# EAGLE board teensyMotors02_up (EAGLE 9.1.3)
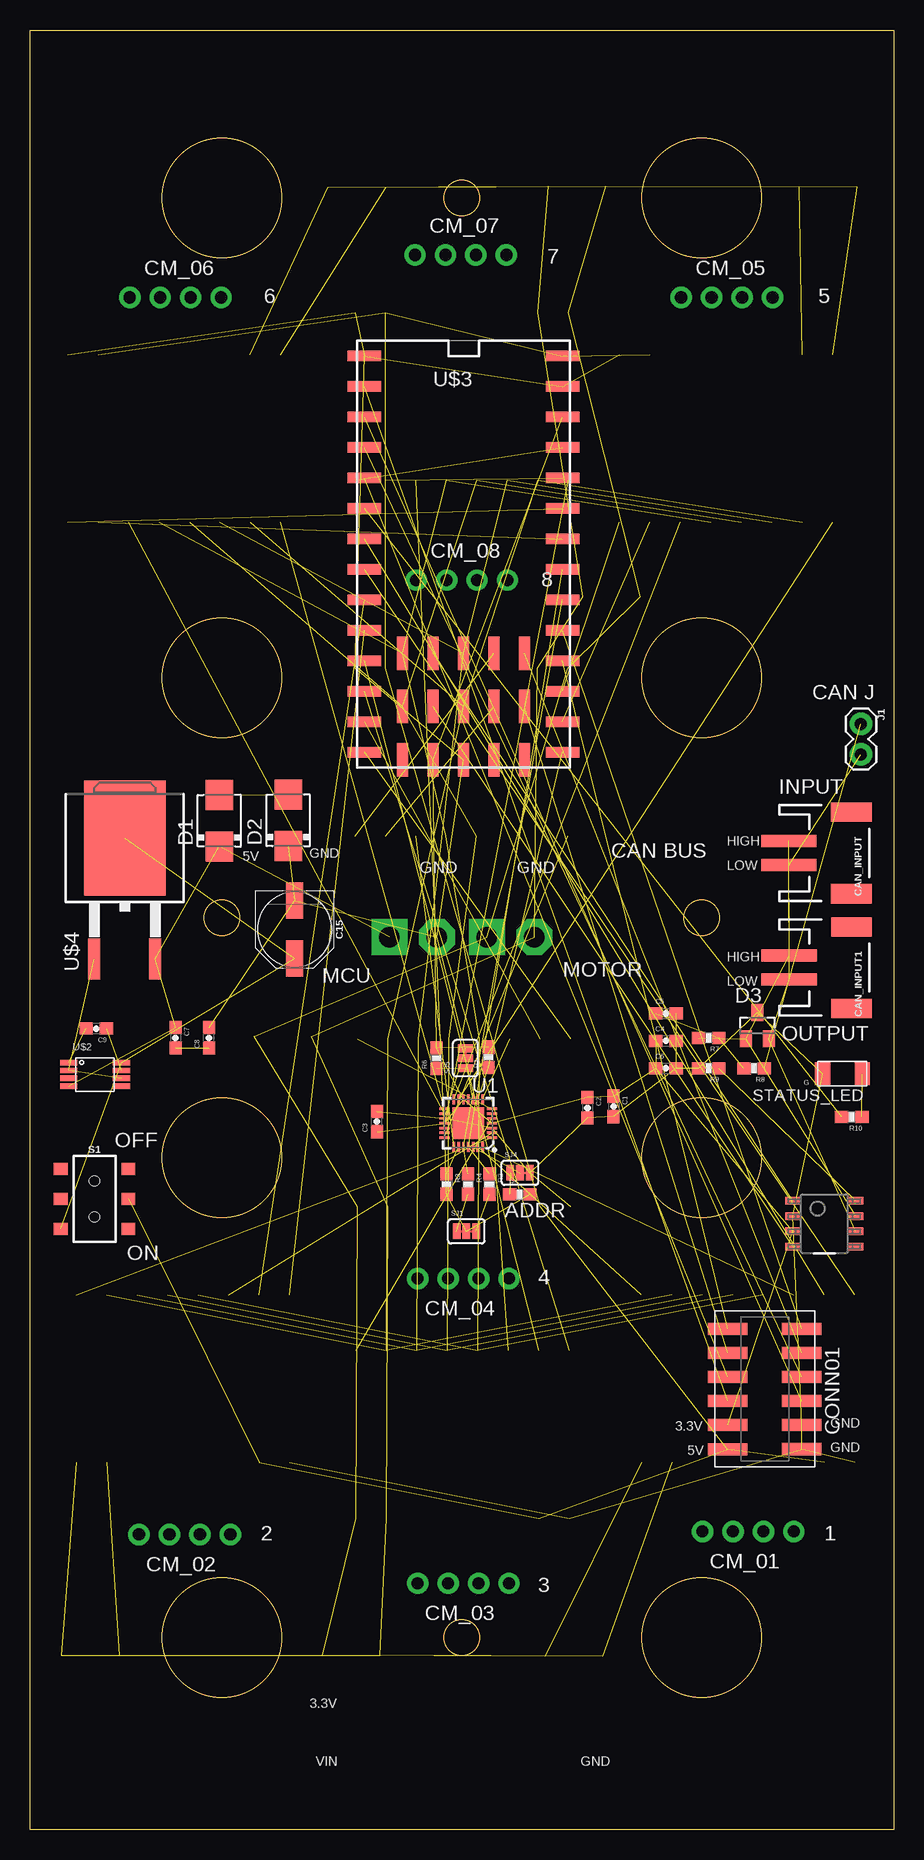
[diagram p0: board, top side]
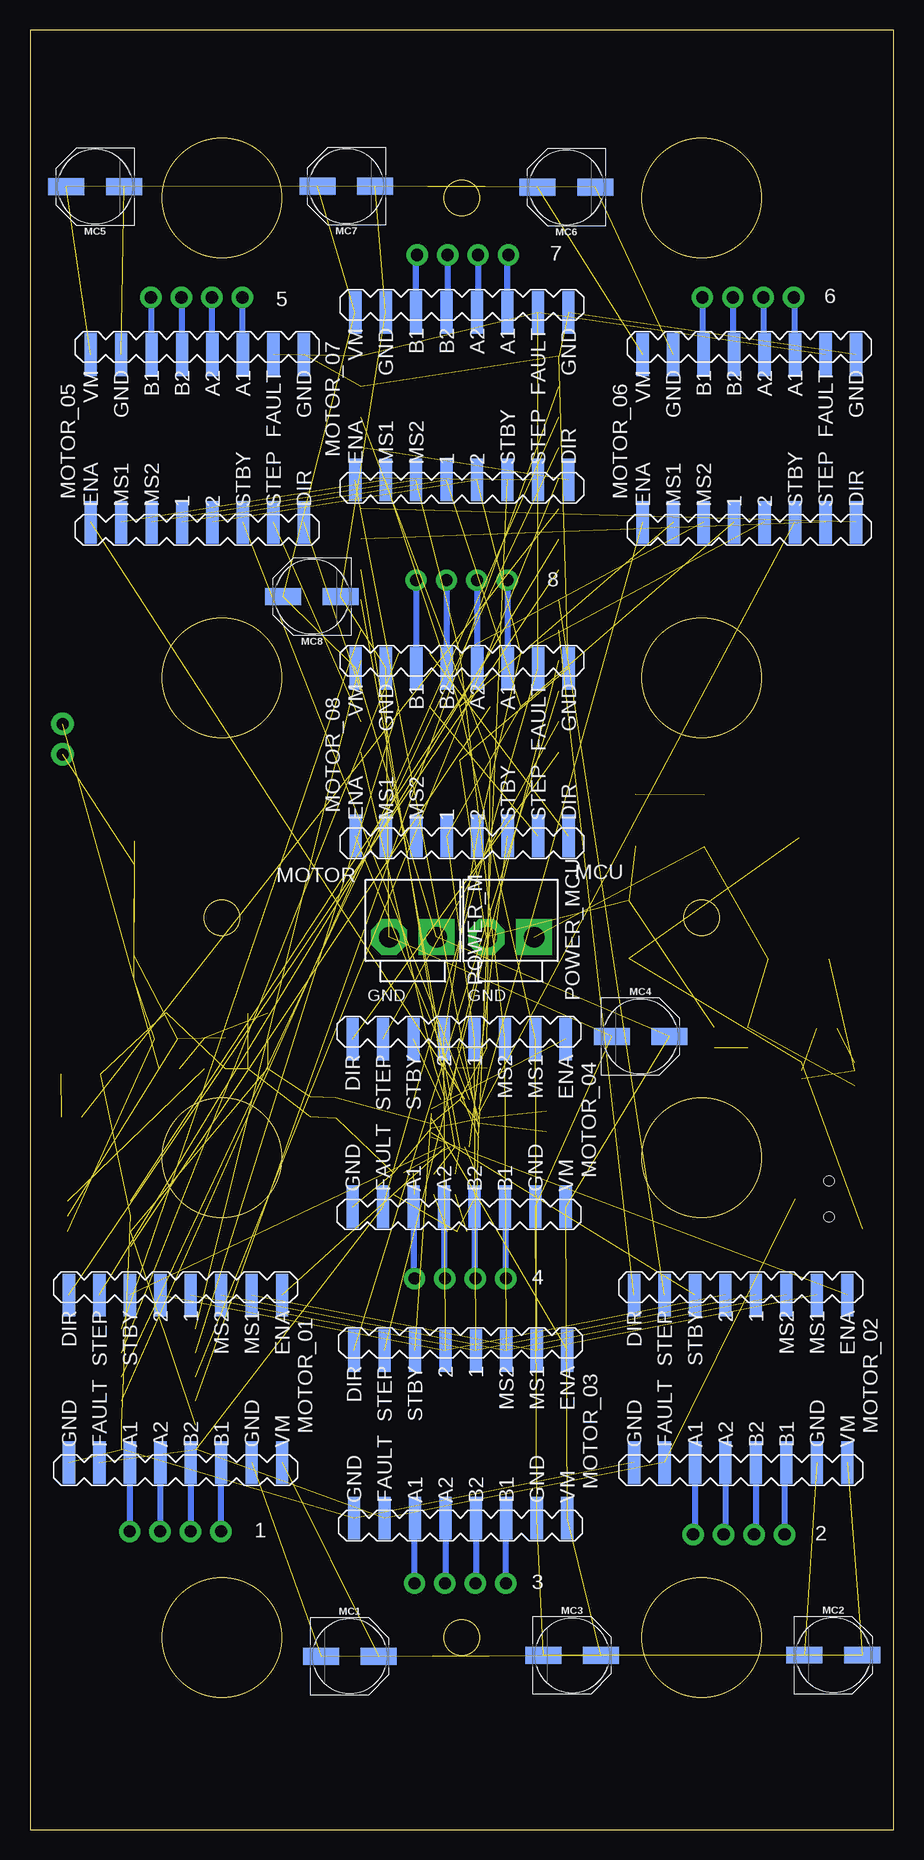
[diagram p1: board, bottom side, seen from below]

Size 72 x 150 mm. Coordinates in mm from the lower left corner, seen from the top.
Outline: 72,150 72,0 0,0 0,150 72,150
Outline: circle at 56,136 radius 5
Outline: circle at 56,96 radius 5
Outline: circle at 56,56 radius 5
Outline: circle at 56,16 radius 5
Outline: circle at 16,16 radius 5
Outline: circle at 16,56 radius 5
Outline: circle at 16,96 radius 5
Outline: circle at 16,136 radius 5
Outline: circle at 36,136 radius 1.5
Outline: circle at 16,76 radius 1.5
Outline: circle at 36,16 radius 1.5
Outline: circle at 56,76 radius 1.5
Copper layers (1*2*15*16): Top 0.035mm / dielectric 10mil / Route2 0.035mm / dielectric 40mil / Route15 0.035mm / dielectric 10mil / Bottom 0.035mm
Design rules "default *": minimum track width 6mil, minimum drill 0.35mm, track to track 6mil, track to pad 6mil, pad to pad 6mil, via to via 6mil, smd to smd 6mil, copper to edge 40mil, drill to drill 6mil, minimum pad ring 10mil, minimum via ring 8mil, stop-mask expansion 4mil, vias tented up to drill 0mil, thermal gap 10mil
Net classes: 0 default: width 0.2 mm; 1 gnd: width 0.2 mm; 3 vcc: width 0.45 mm

## Footprints (pad centres in the part's own frame; a part is rotated, then mirrored left to right if it is on the bottom)
0603-CAP = smd 1.1 x 1: 1 -0.85,0; 2 0.85,0
PANASONIC_D = smd 3 x 1.4: + 2.4,0; - -2.4,0
JST-2-SMD = smd 1 x 4.6: 1 -1,-3.7; 2 1,-3.7 | smd 1.6 x 3.4: NC1 -3.4,1.5; NC2 3.4,1.5
1X04-CLEANBIG = drill 1.016 pad 1.778: 1 -3.81,0; 2 -1.27,0; 3 1.27,0; 4 3.81,0
TMMH-105-12 = smd 1.016 x 3.302: 1 -5.27,-3.086; 2 -5.27,3.086; 3 -3.27,-3.086; 4 -3.27,3.086; 5 -1.27,-3.086; 6 -1.27,3.086; 7 0.73,-3.086; 8 0.73,3.086; 9 2.73,-3.086; 10 2.73,3.086; 11 4.781,-3.099; 12 4.755,3.086
DO214AA = smd 2.5 x 2.3: A 2.15,0; C -2.15,0
SOT23 = smd 1 x 1.4: 1 -0.95,-1.1; 2 0.95,-1.1; 3 0,1.1
1X02 = drill 1.016 pad 1.88: 1 0,0; 2 2.54,0
DRV8880 = smd 3.556 x 1.016: 1 -6.985,1.27; 2 -6.985,-1.27; A1 6.985,-3.81; A2 6.985,-1.27; B1 6.985,3.81; B2 6.985,1.27; DIR -6.985,-8.89; ENA -6.985,8.89; FAULT 6.985,-6.35; GND_0 6.985,-8.89; GND_1 6.985,6.35; MS1 -6.985,6.35; MS2 -6.985,3.81; STBY -6.985,-3.81; STEP -6.985,-6.35; VM 6.985,8.89
B2P-VH = drill 1.7 pad 3 square: 1 -1.98,0 | drill 1.7 pad 3 octagon: 2 1.98,0
0603-RES = smd 1.1 x 1: 1 -0.85,0; 2 0.85,0
SWITCH_DPDT_SMD_AYZ0202 = smd 1 x 1.15: 1 -2.5,2.825; 2 0,2.825; 3 2.5,2.825; 4 -2.5,-2.825; 5 0,-2.825; 6 2.5,-2.825 | hole 0.85: 1.5,0; -1.5,0
PAD-JUMPER-3-3OF3_NC_BY_TRACE_YES_SILK_FULL_BOX = smd 0.635 x 1.27: 1 -0.813,0; 2 0,0; 3 0.813,0
PAD-JUMPER-3-2OF3_NC_BY_TRACE_YES_SILK_FULL_BOX = smd 0.635 x 1.27: 1 -0.813,0; 2 0,0; 3 0.813,0
LED1206FAB = smd 1.27 x 1.905: 1 -1.651,0; 2 1.651,0
QFN-28 = smd 0.85 x 0.2: 1 -1.975,1.2; 2 -1.975,0.8; 3 -1.975,0.4; 4 -1.975,0; 5 -1.975,-0.4; 6 -1.975,-0.8; 7 -1.975,-1.2; 15 1.975,-1.2; 16 1.975,-0.8; 17 1.975,-0.4; 18 1.975,0; 19 1.975,0.4; 20 1.975,0.8; 21 1.975,1.2 | smd 0.2 x 0.85: 8 -1.2,-1.975; 9 -0.8,-1.975; 10 -0.4,-1.975; 11 0,-1.975; 12 0.4,-1.975; 13 0.8,-1.975; 14 1.2,-1.975; 22 1.2,1.975; 23 0.8,1.975; 24 0.4,1.975; 25 0,1.975; 26 -0.4,1.975; 27 -0.8,1.975; 28 -1.2,1.975 | smd 2.65 x 2.65: 29 0,0
SN65HVD232Q = smd 1.27 x 0.635: CANH 2.625,0.635; CANL 2.625,-0.635; D -2.625,1.905; GND -2.625,0.635; R -2.625,-1.905; RS 2.625,1.905; VCC -2.625,-0.635; VREF 2.625,-1.905
VSSOP(8) = smd 1.435 x 0.445: ANODE -2.2,-1.05; CATHODE 2.2,0.9; GDRIVE 2.2,-0.4; GPD -2.2,0.25; NC@1 -2.2,-0.4; NC@2 2.2,-1.05; VCAPH 2.2,0.25; VCAPL -2.2,0.9
TEENSY_4.0_SMD = smd 2.794 x 0.889: 0 -8.255,13.97; 1 -8.255,11.43; 2 -8.255,8.89; 3 -8.255,6.35; 3.3V 8.255,11.43; 4 -8.255,3.81; 5 -8.255,1.27; 6 -8.255,-1.27; 7 -8.255,-3.81; 8 -8.255,-6.35; 9 -8.255,-8.89; 10 -8.255,-11.43; 11 -8.255,-13.97; 12 -8.255,-16.51; 13 8.255,-16.51; 14/A0 8.255,-13.97; 15/A1 8.255,-11.43; 16/A2 8.255,-8.89; 17/A3 8.255,-6.35; 18/A4 8.255,-3.81; 19/A5 8.255,-1.27; 20/A6 8.255,1.27; 21/A7 8.255,3.81; 22/A8 8.255,6.35; 23/A9 8.255,8.89; GND -8.255,16.51; GND2 8.255,13.97; VIN 8.255,16.51 | smd 0.889 x 2.794: 3.3V1 -2.54,-17.145; 24 5.08,-12.7; 25 5.08,-8.255; 26 2.54,-12.7; 27 2.54,-8.255; 28 0,-12.7; 29 0,-8.255; 30 -2.54,-12.7; 31 -2.54,-8.255; 32 -5.08,-12.7; 33 -5.08,-8.255; GND1 0,-17.145; PGM 2.54,-17.145; RESET 5.08,-17.145; VBAT -5.08,-17.145
TO263-3 = smd 1 x 3.4: 1 -2.54,-9.14; 3 2.54,-9.14 | smd 6.8 x 9.6: 4 0,0.96

## Placement (x,y rotation side)
C1  0.1uF  [0603-CAP]  48.66,60.27 270 top
C2  0.1uF  [0603-CAP]  46.48,60.16 270 top
C3  0.1uF  [0603-CAP]  28.93,59.01 90 top
C4  2.2uf  [0603-CAP]  53.02,65.74 0 top
C5  4.7uf  [0603-CAP]  53.02,68.03 0 top
C6  0.1uf  [0603-CAP]  53.02,63.45 0 top
C7  0.1uf  [0603-CAP]  12.13,65.99 270 top
C8  0.1uf  [0603-CAP]  14.92,65.99 90 top
C9  2.2uf  [0603-CAP]  5.53,66.76 180 top
C15  100uF  [PANASONIC_D]  22.07,75.02 270 top
CAN_INPUT  [JST-2-SMD]  66.97,81.4 270 top
CAN_INPUT1  [JST-2-SMD]  66.99,71.84 270 top
CM_01  1X04_STRAIGHT  [1X04-CLEANBIG]  59.88,24.85 180 top
CM_02  1X04_STRAIGHT  [1X04-CLEANBIG]  12.89,24.59 180 top
CM_03  1X04_STRAIGHT  [1X04-CLEANBIG]  36.13,20.53 180 top
CM_04  1X04_STRAIGHT  [1X04-CLEANBIG]  36.13,45.93 180 top
CM_05  1X04_STRAIGHT  [1X04-CLEANBIG]  58.1,127.72 0 top
CM_06  1X04_STRAIGHT  [1X04-CLEANBIG]  12.13,127.72 0 top
CM_07  1X04_STRAIGHT  [1X04-CLEANBIG]  35.91,131.24 0 top
CM_08  1X04_STRAIGHT  [1X04-CLEANBIG]  36.01,104.15 0 top
CONN01  TMMH-105-12  [TMMH-105-12]  61.25,36.46 270 top
D1  S2M  [DO214AA]  15.78,84.09 90 top
D2  S2M  [DO214AA]  21.54,84.11 90 top
D3  PESD1CAN  [SOT23]  60.64,67.01 0 top
J1  [1X02]  69.28,92.16 270 top
MC1  100uF  [PANASONIC_D]  45.34,14.45 0 bottom
MC2  100uF  [PANASONIC_D]  5.02,14.54 0 bottom
MC3  100uF  [PANASONIC_D]  26.8,14.51 0 bottom
MC4  100uF  [PANASONIC_D]  21.1,66.1 0 bottom
MC5  100uF  [PANASONIC_D]  66.56,136.94 180 bottom
MC6  100uF  [PANASONIC_D]  27.27,136.89 180 bottom
MC7  100uF  [PANASONIC_D]  45.61,136.98 180 bottom
MC8  100uF  [PANASONIC_D]  48.48,102.77 180 bottom
MOTOR_01  DRV8880  [DRV8880]  59.86,37.57 270 bottom
MOTOR_02  DRV8880  [DRV8880]  12.74,37.57 270 bottom
MOTOR_03  DRV8880  [DRV8880]  36.09,32.94 270 bottom
MOTOR_04  DRV8880  [DRV8880]  36.22,58.89 270 bottom
MOTOR_05  DRV8880  [DRV8880]  58.05,115.95 90 bottom
MOTOR_06  DRV8880  [DRV8880]  12.02,115.95 90 bottom
MOTOR_07  DRV8880  [DRV8880]  35.99,119.47 90 bottom
MOTOR_08  DRV8880  [DRV8880]  35.98,89.82 90 bottom
POWER_M  B2P-VH  [B2P-VH]  40.07,74.38 180 bottom
POWER_MCU  B2P-VH  [B2P-VH]  31.94,74.38 180 bottom
R1  10K  [0603-RES]  38.23,64.36 90 top
R2  10K  [0603-RES]  38.29,53.8 270 top
R3  10K  [0603-RES]  34.74,53.8 270 top
R4  10K  [0603-RES]  36.51,53.8 270 top
R5  10K  [0603-RES]  40.85,52.93 0 top
R6  10K  [0603-RES]  33.89,64.29 90 top
R7  60  [0603-RES]  56.58,65.99 180 top
R8  60  [0603-RES]  60.39,63.45 180 top
R9  10K  [0603-RES]  56.58,63.45 180 top
R10  500  [0603-RES]  68.52,59.39 180 top
S1  [SWITCH_DPDT_SMD_AYZ0202]  5.39,52.56 270 top
SJ1  [PAD-JUMPER-3-3OF3_NC_BY_TRACE_YES_SILK_FULL_BOX]  36.38,49.87 0 top
SJ4  [PAD-JUMPER-3-2OF3_NC_BY_TRACE_YES_SILK_FULL_BOX]  40.86,54.74 0 top
SJ5  [PAD-JUMPER-3-2OF3_NC_BY_TRACE_YES_SILK_FULL_BOX]  36.3,64.29 90 top
STATUS_LED  LEDFAB1206  [LED1206FAB]  67.73,63 180 top
U1  SX1509  [QFN-28]  36.55,58.87 180 top
U$1  SN65HVD232Q  [SN65HVD232Q]  66.23,50.5 0 top
U$2  [VSSOP(8)]  5.43,63.02 0 top
U$3  TEENSY_4.0_WITH_SMD_HEADER_PINSTEENSY_4.0_SMD  [TEENSY_4.0_SMD]  36.15,106.31 0 top
U$4  [TO263-3]  7.91,81.69 0 top

## Library data of the parts
C1-C9 = SparkFun-Capacitors; PROD_ID: CAP-00810
C15 MC1-MC8 = SparkFun-Capacitors; PROD_ID: CAP-12547
CAN_INPUT CAN_INPUT1 = SparkFun-Connectors; PROD_ID: CONN-11443
CM_01-CM_08 = adafruit
CONN01 = TMMH-105-XX-XX-DV
D1 D2 = s2x_10; MF: Fairchild; MPN: S2M; OC_FARNELL: 9843876; OC_NEWARK: 58K9553
D3 = diode
J1 = SparkFun-Connectors
MOTOR_01-MOTOR_08 = STSPIN220
POWER_M POWER_MCU = con-JST VH
R1-R10 = SparkFun-Resistors; PROD_ID: RES-00824
S1 = SparkFun-Switches; PROD_ID: SWCH-08179; SF_SKU: COM-00597; SPICEPREFIX: X
SJ1 SJ4 SJ5 = SparkFun-Passives
STATUS_LED = fab
U1 = SparkFun-DigitalIC; PROD_ID: IC-11311
U$1 = TCAN1042DRQ1
U$2 = 1zac; MPN: LM74610-Q1
U$3 = Teensy4
U$4 = v-reg-2

## Nets
0_SX0: MOTOR_01.ENA U1.27
1_SX0: MOTOR_01.STBY U1.28
2_SX0: MOTOR_02.ENA U1.1
3.3V [vcc]: C1.1 C2.1 C3.1 C4.1 C6.1 CONN01.9 R1.2 R3.2 R5.2 R6.2 SJ1.2 U1.4 U1.12 U1.18 U$1.VCC U$3.3.3V U$3.3.3V1
3_SX0: MOTOR_02.STBY U1.2
4_SX0: MOTOR_03.ENA U1.5
5_SX0: MOTOR_03.STBY U1.6
6_SX0: MOTOR_04.ENA U1.7
7_SX0: MOTOR_04.STBY U1.8
8_SX0: MOTOR_05.ENA U1.13
9_SX0: MOTOR_05.STBY U1.14
10_SX0: MOTOR_06.ENA U1.15
11_SX0: MOTOR_06.STBY U1.16
12_SX0: MOTOR_07.ENA U1.19
13_SX0: MOTOR_07.STBY U1.20
14_SX0: MOTOR_08.ENA U1.21
15_SX0: MOTOR_08.STBY U1.22
!INT_SX0: R1.1 U1.9 U$3.13
!RESET_SX0: R3.1 U1.23
ADDR0_SX0: SJ4.2 U1.26
ADDR1_SX0: SJ5.2 U1.10
CAN_H: CAN_INPUT1.1 CAN_INPUT.1 D3.1 R7.2 U$1.CANH
CAN_L: CAN_INPUT1.2 CAN_INPUT.2 D3.2 J1.2 U$1.CANL
CAN_RX2: CONN01.7 U$3.0
CAN_RX3: U$1.R U$3.30
CAN_TX2: CONN01.8 U$3.1
CAN_TX3: U$1.D U$3.31
GND_M [gnd]: MC1.- MC2.- MC3.- MC4.- MC5.- MC6.- MC7.- MC8.- MOTOR_01.GND_1 MOTOR_02.GND_1 MOTOR_03.GND_1 MOTOR_04.GND_1 MOTOR_05.GND_1 MOTOR_06.GND_1 MOTOR_07.GND_1 MOTOR_08.GND_1 POWER_M.2
GND_MCU [gnd]: C1.2 C2.2 C3.2 C4.2 C5.2 C6.2 C8.2 C15.- CONN01.10 CONN01.12 D2.C D3.3 MOTOR_01.GND_0 MOTOR_02.GND_0 MOTOR_03.GND_0 MOTOR_04.GND_0 MOTOR_05.GND_0 MOTOR_06.GND_0 MOTOR_07.GND_0 MOTOR_08.GND_0 POWER_MCU.2 R9.2 SJ4.3 SJ5.3 STATUS_LED.2 U1.3 U1.17 U1.29 U$1.GND U$3.GND U$3.GND1 U$3.GND2
MA1_01 [vcc]: CM_01.1 MOTOR_01.A1
MA1_02 [vcc]: CM_02.1 MOTOR_02.A1
MA1_03 [vcc]: CM_03.1 MOTOR_03.A1
MA1_04 [vcc]: CM_04.1 MOTOR_04.A1
MA1_05 [vcc]: CM_05.1 MOTOR_05.A1
MA1_06 [vcc]: CM_06.1 MOTOR_06.A1
MA1_07 [vcc]: CM_07.1 MOTOR_07.A1
MA1_08 [vcc]: CM_08.1 MOTOR_08.A1
MA2_01 [vcc]: CM_01.2 MOTOR_01.A2
MA2_02 [vcc]: CM_02.2 MOTOR_02.A2
MA2_03 [vcc]: CM_03.2 MOTOR_03.A2
MA2_04 [vcc]: CM_04.2 MOTOR_04.A2
MA2_05 [vcc]: CM_05.2 MOTOR_05.A2
MA2_06 [vcc]: CM_06.2 MOTOR_06.A2
MA2_07 [vcc]: CM_07.2 MOTOR_07.A2
MA2_08 [vcc]: CM_08.2 MOTOR_08.A2
MB1_01 [vcc]: CM_01.4 MOTOR_01.B1
MB1_02 [vcc]: CM_02.4 MOTOR_02.B1
MB1_03 [vcc]: CM_03.4 MOTOR_03.B1
MB1_04 [vcc]: CM_04.4 MOTOR_04.B1
MB1_05 [vcc]: CM_05.4 MOTOR_05.B1
MB1_06 [vcc]: CM_06.4 MOTOR_06.B1
MB1_07 [vcc]: CM_07.4 MOTOR_07.B1
MB1_08 [vcc]: CM_08.4 MOTOR_08.B1
MB2_01 [vcc]: CM_01.3 MOTOR_01.B2
MB2_02 [vcc]: CM_02.3 MOTOR_02.B2
MB2_03 [vcc]: CM_03.3 MOTOR_03.B2
MB2_04 [vcc]: CM_04.3 MOTOR_04.B2
MB2_05 [vcc]: CM_05.3 MOTOR_05.B2
MB2_06 [vcc]: CM_06.3 MOTOR_06.B2
MB2_07 [vcc]: CM_07.3 MOTOR_07.B2
MB2_08 [vcc]: CM_08.3 MOTOR_08.B2
MDIR_01: MOTOR_01.DIR U$3.6
MDIR_02: MOTOR_02.DIR U$3.8
MDIR_03: MOTOR_03.DIR U$3.10
MDIR_04: MOTOR_04.DIR U$3.12
MDIR_05: MOTOR_05.DIR U$3.15/A1
MDIR_06: MOTOR_06.DIR U$3.21/A7
MDIR_07: MOTOR_07.DIR U$3.23/A9
MDIR_08: MOTOR_08.DIR U$3.27
MMS1: MOTOR_01.MS1 MOTOR_02.MS1 MOTOR_03.MS1 MOTOR_04.MS1 MOTOR_05.MS1 MOTOR_06.MS1 MOTOR_07.MS1 U$3.28
MMS2: MOTOR_01.MS2 MOTOR_02.MS2 MOTOR_03.MS2 MOTOR_04.MS2 MOTOR_05.MS2 MOTOR_06.MS2 MOTOR_07.MS2 U$3.29
MSS1: MOTOR_08.MS1
MSS2: MOTOR_08.MS2
MSTEP_01: MOTOR_01.STEP U$3.5
MSTEP_02: MOTOR_02.STEP U$3.7
MSTEP_03: MOTOR_03.STEP U$3.9
MSTEP_04: MOTOR_04.STEP U$3.11
MSTEP_05: MOTOR_05.STEP U$3.14/A0
MSTEP_06: MOTOR_06.STEP U$3.20/A6
MSTEP_07: MOTOR_07.STEP U$3.22/A8
MSTEP_08: MOTOR_08.STEP U$3.26
N$1: R2.2 SJ1.3
N$2: C9.1 U$2.VCAPH
N$3: U$1.VREF
N$4: U$2.GDRIVE U$2.GPD U$4.1
N$5: C9.2 U$2.VCAPL
N$6: R9.1 U$1.RS
N$7: R4.2 SJ1.1
N$8: R5.1 SJ4.1
N$9: C7.2 C8.1
N$10: R6.1 SJ5.1
N$12: D1.A D2.A
N$13: C5.1 R7.1 R8.2
N$14: J1.1 R8.1
N$193: R10.1 STATUS_LED.1
NEO_PIXEL: CONN01.5 U$3.3
OSCIO_SX0: U1.11
PIN_2: CONN01.6 U$3.2
REG_5V [vcc]: C15.+ S1.6 U$2.CATHODE U$4.4
SCL_00: R2.1 U1.25 U$3.19/A5
SCL_01: CONN01.1 U$3.16/A2
SCL_02: CONN01.3 U$3.24
SDA_00: R4.1 U1.24 U$3.18/A4
SDA_01: CONN01.2 U$3.17/A3
SDA_02: CONN01.4 U$3.25
STATUS_PIN: R10.2 U$3.4
TRQ1: MOTOR_01.1 MOTOR_02.1 MOTOR_03.1 MOTOR_04.1 MOTOR_05.1 MOTOR_06.1 MOTOR_07.1 MOTOR_08.1 U$3.32
TRQ2: MOTOR_01.2 MOTOR_02.2 MOTOR_03.2 MOTOR_04.2 MOTOR_05.2 MOTOR_06.2 MOTOR_07.2 MOTOR_08.2 U$3.33
VBAT: U$3.VBAT
VCC_5V [vcc]: CONN01.11 MOTOR_01.FAULT MOTOR_02.FAULT MOTOR_03.FAULT MOTOR_04.FAULT MOTOR_05.FAULT MOTOR_06.FAULT MOTOR_07.FAULT MOTOR_08.FAULT S1.2 U$3.VIN
VCC_M [vcc]: MC1.+ MC2.+ MC3.+ MC4.+ MC5.+ MC6.+ MC7.+ MC8.+ MOTOR_01.VM MOTOR_02.VM MOTOR_03.VM MOTOR_04.VM MOTOR_05.VM MOTOR_06.VM MOTOR_07.VM MOTOR_08.VM POWER_M.1
VCC_MCU [vcc]: C7.1 D1.C POWER_MCU.1 U$2.ANODE U$4.3

## Tracks (layer width: path | path; a pad name or v marks a point on that pad's centre or on a via)
0_SX0  (1 unrouted)
1_SX0  (1 unrouted)
2_SX0  (1 unrouted)
3.3V  (16 unrouted)
3_SX0  (1 unrouted)
4_SX0  (1 unrouted)
5_SX0  (1 unrouted)
6_SX0  (1 unrouted)
7_SX0  (1 unrouted)
8_SX0  (1 unrouted)
9_SX0  (1 unrouted)
10_SX0  (1 unrouted)
11_SX0  (1 unrouted)
12_SX0  (1 unrouted)
13_SX0  (1 unrouted)
14_SX0  (1 unrouted)
15_SX0  (1 unrouted)
!INT_SX0  (2 unrouted)
!RESET_SX0  (1 unrouted)
ADDR0_SX0  (1 unrouted)
ADDR1_SX0  (1 unrouted)
CAN_H  (4 unrouted)
CAN_L  (4 unrouted)
CAN_RX2  (1 unrouted)
CAN_RX3  (1 unrouted)
CAN_TX2  (1 unrouted)
CAN_TX3  (1 unrouted)
GND_M  (16 unrouted)
GND_MCU  (31 unrouted)
MA1_01
  Bottom 0.508: MOTOR_01.A1 63.67,24.87 CM_01.1
MA1_02
  Bottom 0.508: MOTOR_02.A1 16.55,24.75 CM_02.1
MA1_03
  Bottom 0.508: CM_03.1 39.94,25.92 MOTOR_03.A1
MA1_04
  Bottom 0.508: MOTOR_04.A1 40.03,46.01 CM_04.1
MA1_05
  Bottom 0.508: CM_05.1 54.29,122.99 MOTOR_05.A1
MA1_06
  Bottom 0.508: MOTOR_06.A1 8.21,127.61 CM_06.1
MA1_07
  Bottom 0.508: MOTOR_07.A1 32.18,131.16 CM_07.1
MA1_08
  Bottom 0.508: CM_08.1 32.2,96.83 MOTOR_08.A1
MA2_01
  Bottom 0.508: MOTOR_01.A2 61.13,24.87 CM_01.2
MA2_02
  Bottom 0.508: MOTOR_02.A2 14.01,24.75 CM_02.2
MA2_03
  Bottom 0.508: MOTOR_03.A2 37.36,20.57 CM_03.2
MA2_04
  Bottom 0.508: MOTOR_04.A2 37.49,46.01 CM_04.2
MA2_05
  Bottom 0.508: CM_05.2 56.83,122.99 MOTOR_05.A2
MA2_06
  Bottom 0.508: CM_06.2 10.86,123.05 MOTOR_06.A2
MA2_07
  Bottom 0.508: CM_07.2 34.64,126.54 MOTOR_07.A2
MA2_08
  Bottom 0.508: CM_08.2 34.74,96.83 MOTOR_08.A2
MB1_01
  Bottom 0.508: CM_01.4 56.07,30.56 MOTOR_01.B1
MB1_02
  Bottom 0.508: CM_02.4 9.08,30.43 MOTOR_02.B1
MB1_03
  Bottom 0.508: CM_03.4 32.32,25.92 MOTOR_03.B1
MB1_04
  Bottom 0.508: CM_04.4 32.32,51.82 MOTOR_04.B1
MB1_05
  Bottom 0.508: CM_05.4 61.91,122.99 MOTOR_05.B1
MB1_06
  Bottom 0.508: CM_06.4 15.94,123.05 MOTOR_06.B1
MB1_07
  Bottom 0.508: MOTOR_07.B1 39.8,131.16 CM_07.4
MB1_08
  Bottom 0.508: CM_08.4 39.82,96.83 MOTOR_08.B1
MB2_01
  Bottom 0.508: MOTOR_01.B2 58.59,24.87 CM_01.3
MB2_02
  Bottom 0.508: MOTOR_02.B2 11.47,24.75 CM_02.3
MB2_03
  Bottom 0.508: MOTOR_03.B2 34.82,20.57 CM_03.3
MB2_04
  Bottom 0.508: MOTOR_04.B2 34.95,46.01 CM_04.3
MB2_05
  Bottom 0.508: CM_05.3 59.37,122.99 MOTOR_05.B2
MB2_06
  Bottom 0.508: CM_06.3 13.4,123.05 MOTOR_06.B2
MB2_07
  Bottom 0.508: CM_07.3 37.18,126.54 MOTOR_07.B2
MB2_08
  Bottom 0.508: CM_08.3 37.28,96.83 MOTOR_08.B2
MDIR_01  (1 unrouted)
MDIR_02  (1 unrouted)
MDIR_03  (1 unrouted)
MDIR_04  (1 unrouted)
MDIR_05  (1 unrouted)
MDIR_06  (1 unrouted)
MDIR_07  (1 unrouted)
MDIR_08  (1 unrouted)
MMS1  (7 unrouted)
MMS2  (7 unrouted)
MSTEP_01  (1 unrouted)
MSTEP_02  (1 unrouted)
MSTEP_03  (1 unrouted)
MSTEP_04  (1 unrouted)
MSTEP_05  (1 unrouted)
MSTEP_06  (1 unrouted)
MSTEP_07  (1 unrouted)
MSTEP_08  (1 unrouted)
N$1  (1 unrouted)
N$2  (1 unrouted)
N$4  (2 unrouted)
N$5  (1 unrouted)
N$6  (1 unrouted)
N$7  (1 unrouted)
N$8  (1 unrouted)
N$9  (1 unrouted)
N$10  (1 unrouted)
N$12  (1 unrouted)
N$13  (2 unrouted)
N$14  (1 unrouted)
N$193  (1 unrouted)
NEO_PIXEL  (1 unrouted)
PIN_2  (1 unrouted)
REG_5V  (3 unrouted)
SCL_00  (2 unrouted)
SCL_01  (1 unrouted)
SCL_02  (1 unrouted)
SDA_00  (2 unrouted)
SDA_01  (1 unrouted)
SDA_02  (1 unrouted)
STATUS_PIN  (1 unrouted)
TRQ1  (8 unrouted)
TRQ2  (8 unrouted)
VCC_5V  (10 unrouted)
VCC_M  (16 unrouted)
VCC_MCU  (4 unrouted)

## Text on the board
tPlace: 7 | 6 | 5 | 8 | CAN J | INPUT | HIGH | 5V | GND | CAN BUS | GND | GND | LOW | HIGH | MCU | MOTOR | LOW | OUTPUT | G | OFF | ADDR | ON | 4 | GND | 3.3V | GND | 5V | 2 | 1 | 3 | 3.3V | VIN | GND
bPlace: 7 | 6 | 5 | 8 | MCU | MOTOR | GND | GND | 4 | 2 | 1 | 3